# EAGLE board Electrical Design file of Stepper Motor (EAGLE 9.7.0)

Size 94.57 x 100.38 mm. Coordinates in mm from the lower left corner, seen from the top.
Outline: 0,0 94.58,0 94.58,100.38 0,100.38 0,0
Copper layers (1*16): Top 0.035mm / dielectric 1.5mm / Bottom 0.035mm
Design rules "default": minimum track width 6mil, minimum drill 0.35mm, track to track 6mil, track to pad 6mil, pad to pad 6mil, via to via 6mil, smd to smd 6mil, copper to edge 40mil, drill to drill 6mil, minimum pad ring 10mil, minimum via ring 8mil, stop-mask expansion 4mil, vias tented up to drill 0mil, thermal gap 10mil

## Footprints (pad centres in the part's own frame; a part is rotated, then mirrored left to right if it is on the bottom)
1X06 = drill 1.016 long: 1 -6.35,0; 2 -3.81,0; 3 -1.27,0; 4 1.27,0; 5 3.81,0; 6 6.35,0
HA-06-SM065 = drill 1 pad 1.676: 1 -2.54,-2.54; 2 0,2.54; 3 2.54,-2.54
ARDUINO-UNO-R3-SHIELD = drill 1.016 pad 1.88: 3.3V 24.13,-2.54; 5V 24.13,0; A0 24.13,12.7; A1 24.13,15.24; A2 24.13,17.78; A3 24.13,20.32; A4 24.13,22.86; A5 24.13,25.4; AREF -24.13,-13.97; D2 -24.13,20.32; D3 -24.13,17.78; D4 -24.13,15.24; D5 -24.13,12.7; D6 -24.13,10.16; D7 -24.13,7.62; D8 -24.13,3.81; D9 -24.13,1.27; D10 -24.13,-1.27; D11 -24.13,-3.81; D12 -24.13,-6.35; D13 -24.13,-8.89; GND@0 24.13,2.54; GND@1 24.13,5.08; GND@2 -24.13,-11.43; IOREF 24.13,-7.62; NC 24.13,-10.16; RES 24.13,-5.08; RX -24.13,25.4; SCL -24.13,-19.05; SDA -24.13,-16.51; TX -24.13,22.86; VIN 24.13,7.62

## Placement (x,y rotation side)
M1  PINHD-1X06_1X06M  [1X06]  46.34,94.11 0 top
RPOT1  250k  [HA-06-SM065]  87.53,8.26 0 top
U1  ARDUINO-UNO-R3-SHIELD  [ARDUINO-UNO-R3-SHIELD]  47.88,61.1 270 top

## Library data of the parts
M1 RPOT1 U1 = Tinkercad

## Nets
M1_1: M1.1 RPOT1.3 U1.GND@0 U1.GND@1 U1.GND@2
M1_2: M1.2 RPOT1.1 U1.5V
M1_3: M1.3 U1.D11
M1_4: M1.4 U1.D10
M1_5: M1.5 U1.D8
M1_6: M1.6 U1.D9
U1_A0: RPOT1.2 U1.A0

## Tracks (layer width: path | path; a pad name or v marks a point on that pad's centre or on a via)
M1_1  (4 unrouted)
M1_2  (2 unrouted)
M1_3  (1 unrouted)
M1_4  (1 unrouted)
M1_5  (1 unrouted)
M1_6  (1 unrouted)
U1_A0  (1 unrouted)